# Allegro board BandPassButterworthTypeI.brd
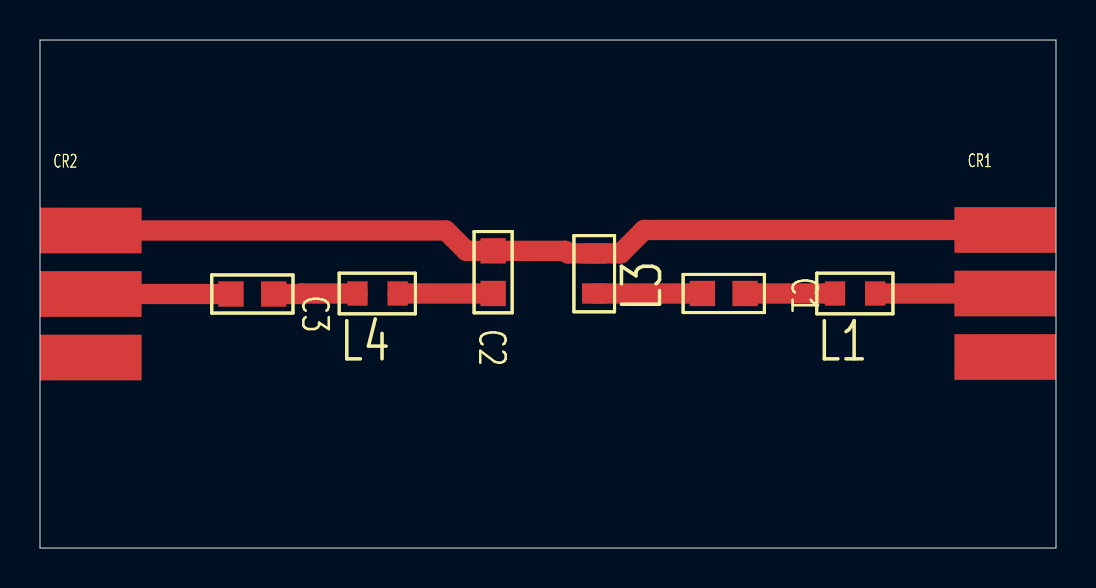
[diagram p0: board, top side]
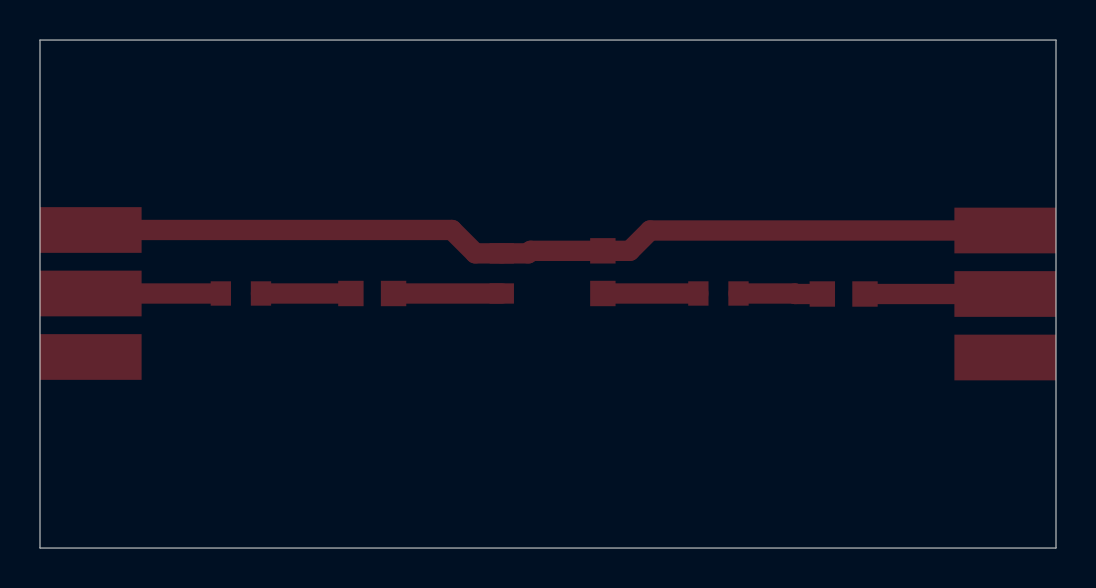
[diagram p1: board, bottom side, seen from below]

Outline 50.8 x 25.4 mm; copper layers: TOP, BOTTOM. Coordinates in mm from the lower left corner of the outline.
Outline path: 0,25.4 50.8,25.4 50.8,0 0,0 0,25.4

## Design rules (mm)
constraint set DEFAULT: min track width 0.305

## Placement (name value [footprint] x y rotation side)
C1  5.30pF  [SMC0805]  33.12 12.73 0 top
C2  4.55nF  [SMC0805]  22.66 14.86 270 top
C3  5.30pF  [SMC0805]  9.55 12.7 0 top
CR1  COAX RECEPTACLE  [MOLEX_SMA]  45.72 12.73 0 top
CR2  COAX RECEPTACLE  [MOLEX_SMA]  0 12.7 0 top
L1  5.68uH  [SML0805]  39.75 12.73 0 top
L3  6.63nH  [SML0805]  27.71 12.73 90 top
L4  5.68uH  [SML0805]  15.88 12.73 0 top

## Library data of the parts
C1-C3 = C
CR1 CR2 = COAX RECEPTACLE
L1 L3 L4 = L

## Footprints (pads in the part's own frame, mm; a bottom-side part is the same pattern mirrored in y, then rotated)
MOLEX_SMA
  rect 5.08x2.286 smd: 1(2.54,3.175) 2(2.54,0) 3(2.54,-3.175)
SMC0805
  rect 1.27x1.27 smd: 1(0,0) 2(2.134,0)
SML0805
  rect 1.016x1.219 smd: 1(0,0) 2(2.007,0)

## Nets
0: C2.1 CR1.1 CR1.3(SHIELD 2) CR2.1 CR2.3(SHIELD 2) L3.2
N03452: CR1.2 L1.2
N03476: C1.1 C2.2 L3.1 L4.2
N03518: C3.1 CR2.2
N034101: C1.2 L1.1
N034261: C3.2 L4.1

## Routing (per net, layer and track width the routed paths; a pad name or vN(x,y) marks a point on that pad's centre or on a via; arc(x,y) is an arc through that point)
0: length 46.7
  TOP w1.016: CR1.1 30.2,15.9 29.03,14.73 L3.2 26.39,14.73 26.26,14.86 C2.1 21.31,14.86 20.29,15.88 CR2.1
N03452: length 6.5
  TOP w1.016: CR1.2 L1.2
N03476: length 10.2
  TOP w1.016: C2.2 L4.2 ; C1.1 L3.1
N03518: length 7
  TOP w1.016: C3.1 CR2.2
N034101: length 4.5
  TOP w1.016: L1.1 C1.2
N034261: length 4.2
  TOP w1.016: C3.2 13.03,12.7 13.06,12.73 L4.1
